# Altium PCB HU_revB.PcbDoc (part 3 of 3)
Units mm, origin at the board's own origin, x right, y up, seen from the top; angles counter-clockwise.
Board outline 180 x 140 mm, 4 copper layers (Top Layer, Mid Layer 1, Mid Layer 2, Bottom Layer), stack 1.586 mm thick; 314 components, 348 nets, 1361 pads, 16 vias.
Unrouted connection lines stored in the file: 902.
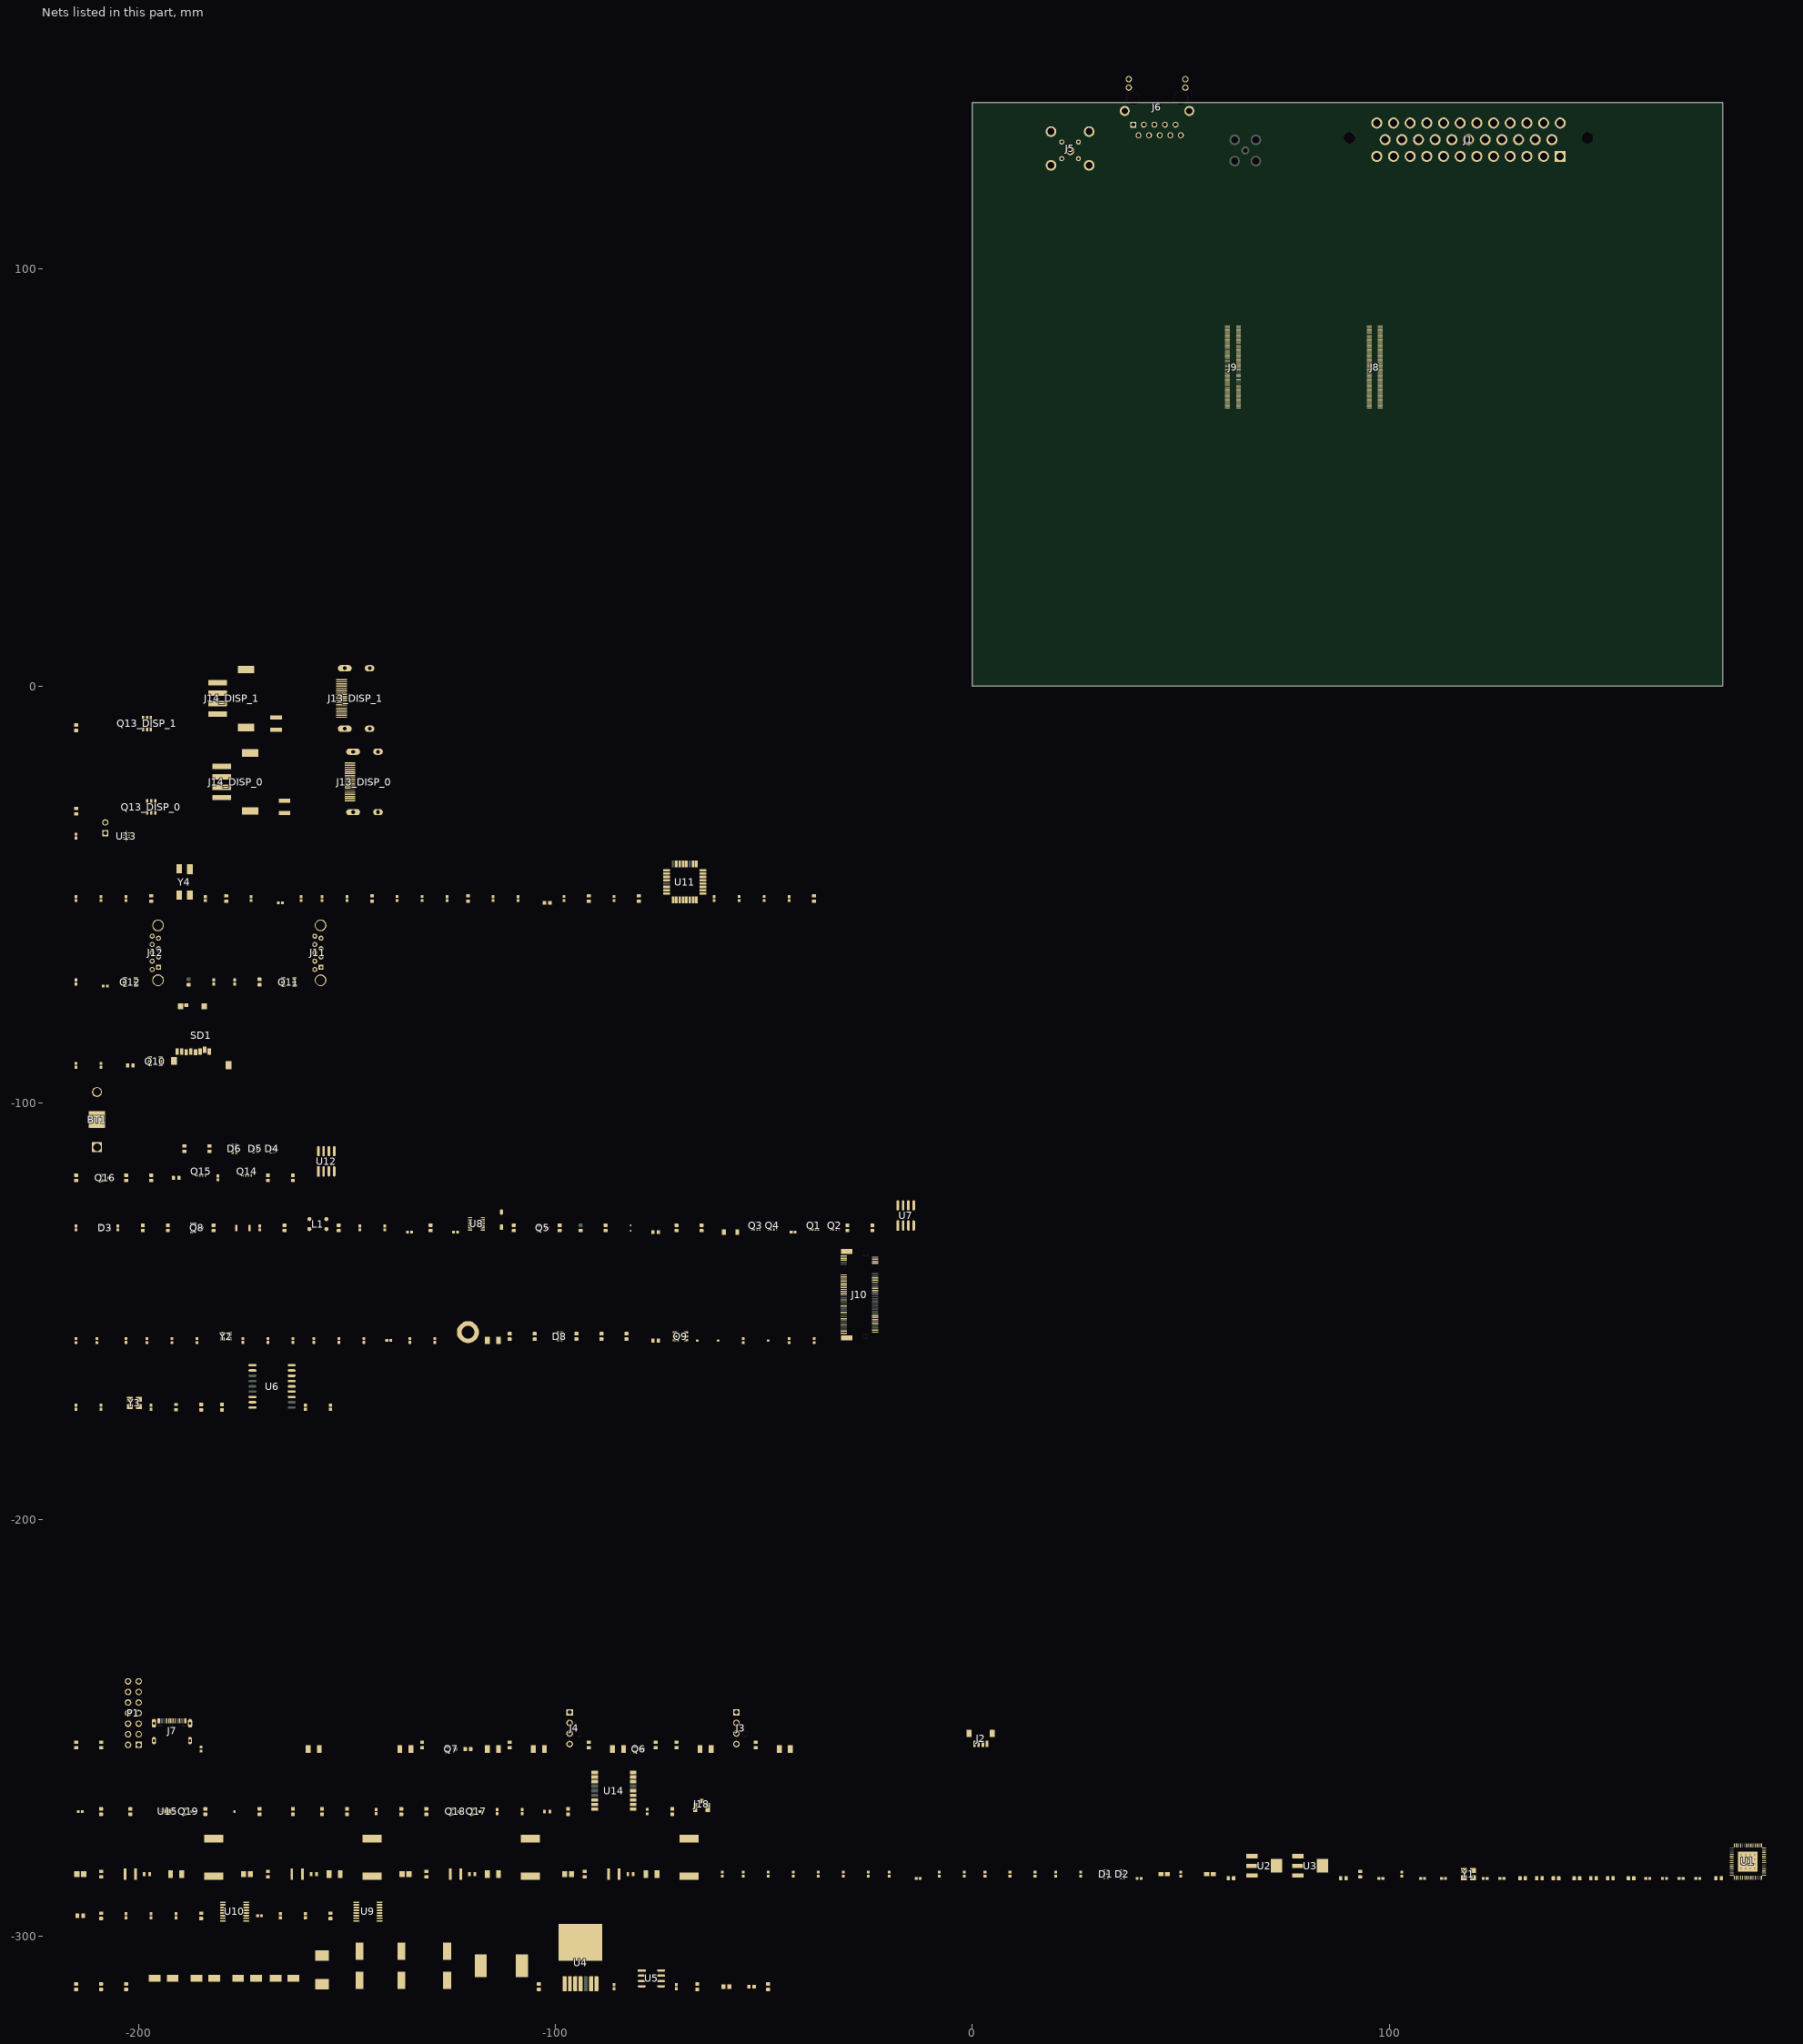
[diagram p2: the nets of this part, all layers, seen from the top]

## Via types
v1: diameter 0.5, hole 0.2, Top Layer to Bottom Layer, 16 vias

## Nets (pads, with @x,y where several pads share a name; then routed paths per layer and width w, separated by ;. In a path a pad name is that pad's centre, name@x,y a point inside that pad or via, vN(x,y) a via of type N, cw(c..) or ccw(c..) an arc to the next point about the centre after c; other vN are vias at no path point) (continued)
PWR_OUT: F3.1 F5.1 F6.1 F7.1 R29.2 U7.1 U7.2
RF_IN: R96.2 U14.11
RL_N: J1.12
RL_P: J1.11
RP_MOS_LINK: D1.2@-56.365,-131 Q1.4 Q3.4 R27.2
RPI_1V8: J9.87 J9.89
RPI_3V3: Q9.5 Q9.6 Q10.5 Q10.6 R51.2 R71.2
RR_N: J1.10
RR_P: J1.9
RXD: U14.3
SD_CLK: J9.58 SD1.5
SD_CMD: J9.61 SD1.3
SD_DAT0: J9.64 SD1.7
SD_DAT1: J9.68 SD1.8
SD_DAT2: J9.70 SD1.1
SD_DAT3: J9.62 SD1.2
SD_PWR_EN: J9.76 Q10.3 R71.1
SIOA_N: C3.1 U1.22
SIOA_P: C1.1 U1.23
SIOB_N: C4.1 U1.19
SIOB_P: C2.1 U1.18
SIOC_N: C7.1 U1.9
SIOC_P: C5.1 U1.10
SIOD_N: C8.1@112.522,-286 U1.6
SIOD_P: C6.1 U1.5
SMB_CLK: J10.40 TP1.1
SMB_DATA: J10.42 TP2.1
SMB_nALERT: J10.44 R53.2 TP3.1
SPI0_MISO: J9.39 U6.15
SPI0_MOSI: J9.43 U6.14
SPI0_nCS0: J9.40 U6.16
SPI0_SCLK: J9.37 U6.13
SPI1_nCS0: J9.50 U9.1
SPI1_nCS1: J9.49 U10.1
SPI3_MISO: J9.33 U8.11
SPI3_MOSI: J9.29 U8.6
SPI3_nCS0: J9.53 U8.14
SPI3_SCLK: J9.38 U8.8
SUB_N: J1.35
SUB_P: J1.34
SUSCLK_32: R52.1 R57.1
TERM_CAP: C17.2@-215,-129.521 R35.1 R37.2
TRD0_N: D4.1 J6.P3 J9.9
TRD0_P: D4.2 J6.P2 J9.11
TRD1_N: D4.5 J6.P5 J9.5
TRD1_P: D4.4 J6.P4 J9.3
TRD2_N: D5.1 J6.P8 J9.10
TRD2_P: D5.2 J6.P7 J9.12
TRD3_N: D5.5 J6.P10 J9.6
TRD3_P: D5.4 J6.P9 J9.4
TUSB2036_X_N: C84.1 U11.29 Y4.3
TUSB2036_X_P: C83.1 U11.30 Y4.1
TXD: U14.2
USB2_CC1: J7.A5 J9.93
USB2_CC2: J7.B5 J9.95
USB2_N: J8.4 U13.8
USB2_P: J8.6 U13.7
USB3_0_D_N: J8.35 J11.2
USB3_0_D_P: J8.33 J11.3
USB3_0_RX_N: J8.27 J11.5
USB3_0_RX_P: J8.29 J11.6
USB3_0_TX_N: J8.39 J11.8
USB3_0_TX_P: J8.41 J11.9
USB3_1_D_N: J8.66 J12.2
USB3_1_D_P: J8.64 J12.3
USB3_1_RX_N: J8.58 J12.5
USB3_1_RX_P: J8.60 J12.6
USB3_1_TX_N: J8.70 J12.8
USB3_1_TX_P: J8.72 J12.9
USB_0_VBUS: C68.1 C69.1 J11.1 Q11.1 Q11.2
USB_1_VBUS: C70.1 C71.1 J12.1 Q12.1 Q12.2
VBAT: BT1.1 BT1.2 J9.75
VBUS_EN: Q11.3 Q12.3 R72.1 R73.1
VCC_RF: Q17.2 R97.1 U14.14
X25_N: C10.2@103,-284.521 U1.16 Y1.3
X25_P: C9.2@98.479,-286 U1.15 Y1.1
X_N: C59.1 U6.7 Y3.3
X_P: C58.1 U6.8 Y3.1
pads on no net: D1.2@31.583,-284.5 D1.4 D1.7 D1.9 D2.2@35.583,-284.5 D2.4 D2.7 D2.9 D4.6 D4.7 D4.9 D4.10 D5.6 D5.7 D5.9 D5.10 J1. J3. J4. J6. J7. J7.A4_B9 J7.A8 J7.B4_A9 J7.B8 J8.12 J9.23 J9.30 J9.42 J9.46 J9.48 J9.52 J9.55 J9.56 J9.57 J9.63 J9.67 J9.69 J9.71 J9.74 J10. J10.5 J10.6 J10.7 J10.8 J10.11 J10.13 J10.17 J10.19 J10.20 J10.22 J10.23 J10.24 J10.25 J10.26 J10.28 J10.29 J10.30 J10.31 J10.32 J10.34 J10.35 J10.36 J10.37 J10.38 J10.46 J10.48 J10.56 J10.58 J10.67 J10.69 J13_DISP_0.14 J13_DISP_1.14 J17.1 J17.2 Q2.4 Q4.4 R69.2 R73.2 U1.1 U1.2 U1.3 U1.12 U1.26 U1.27 U1.33 U1.34 U1.51 U1.52 U4.5 U6.3 U6.4 U6.5 U6.6 U6.10 U6.11 U11.5 U11.27 U11.32 U14.4 U14.5 U14.6 U14.15 U15.1

## Silkscreen, mask and mechanical layers (free items; w line width, h text height)
Mechanical 1:
  the board outline again, w0.254

## Text inside footprints (layer, text, board x,y; h text height)
J13_DISP_0: Top 3D Body "PCB EDGE" at -139.275,-14.5 h0.8 r90
J13_DISP_1: Top 3D Body "PCB EDGE" at -141.275,5.5 h0.8 r90
U8: Top Overlay "*" at -121.114,-127.322 h1.27; Top 3D Body "*" at -119.99,-128.2 h1.27